# Altium PCB Sensor_node.PcbDoc
Units mil, origin at the board's own origin, x right, y up, seen from the top; angles counter-clockwise.
Board outline 3763 x 3557 mil, 2 copper layers (Top Layer, Bottom Layer); 61 components, 41 nets, 227 pads, 43 vias.
Unrouted connection lines stored in the file: 1.
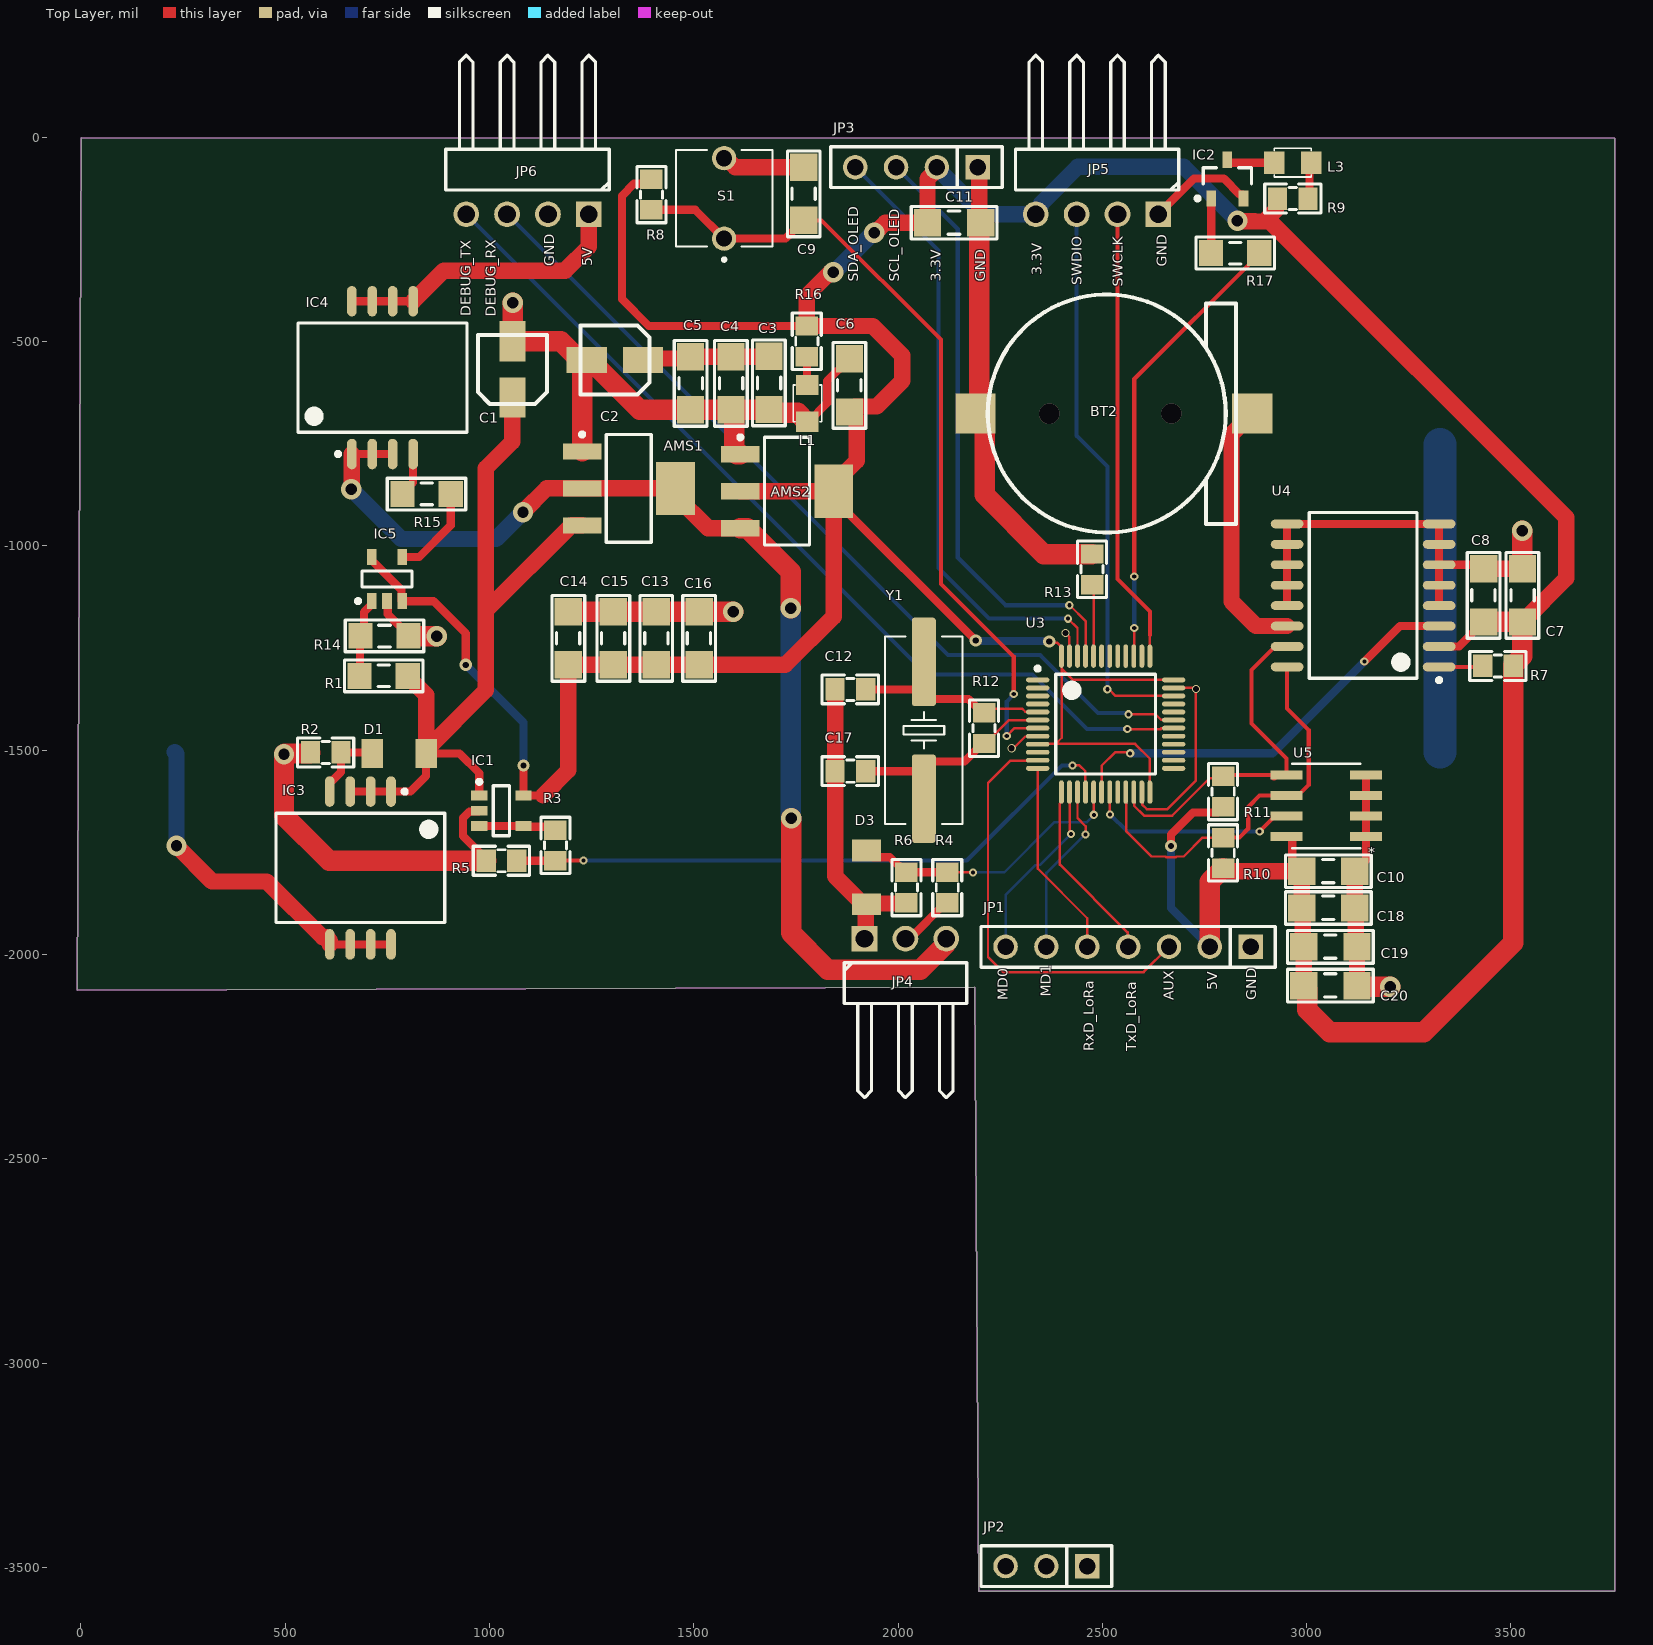
[diagram p0: Top Layer view]
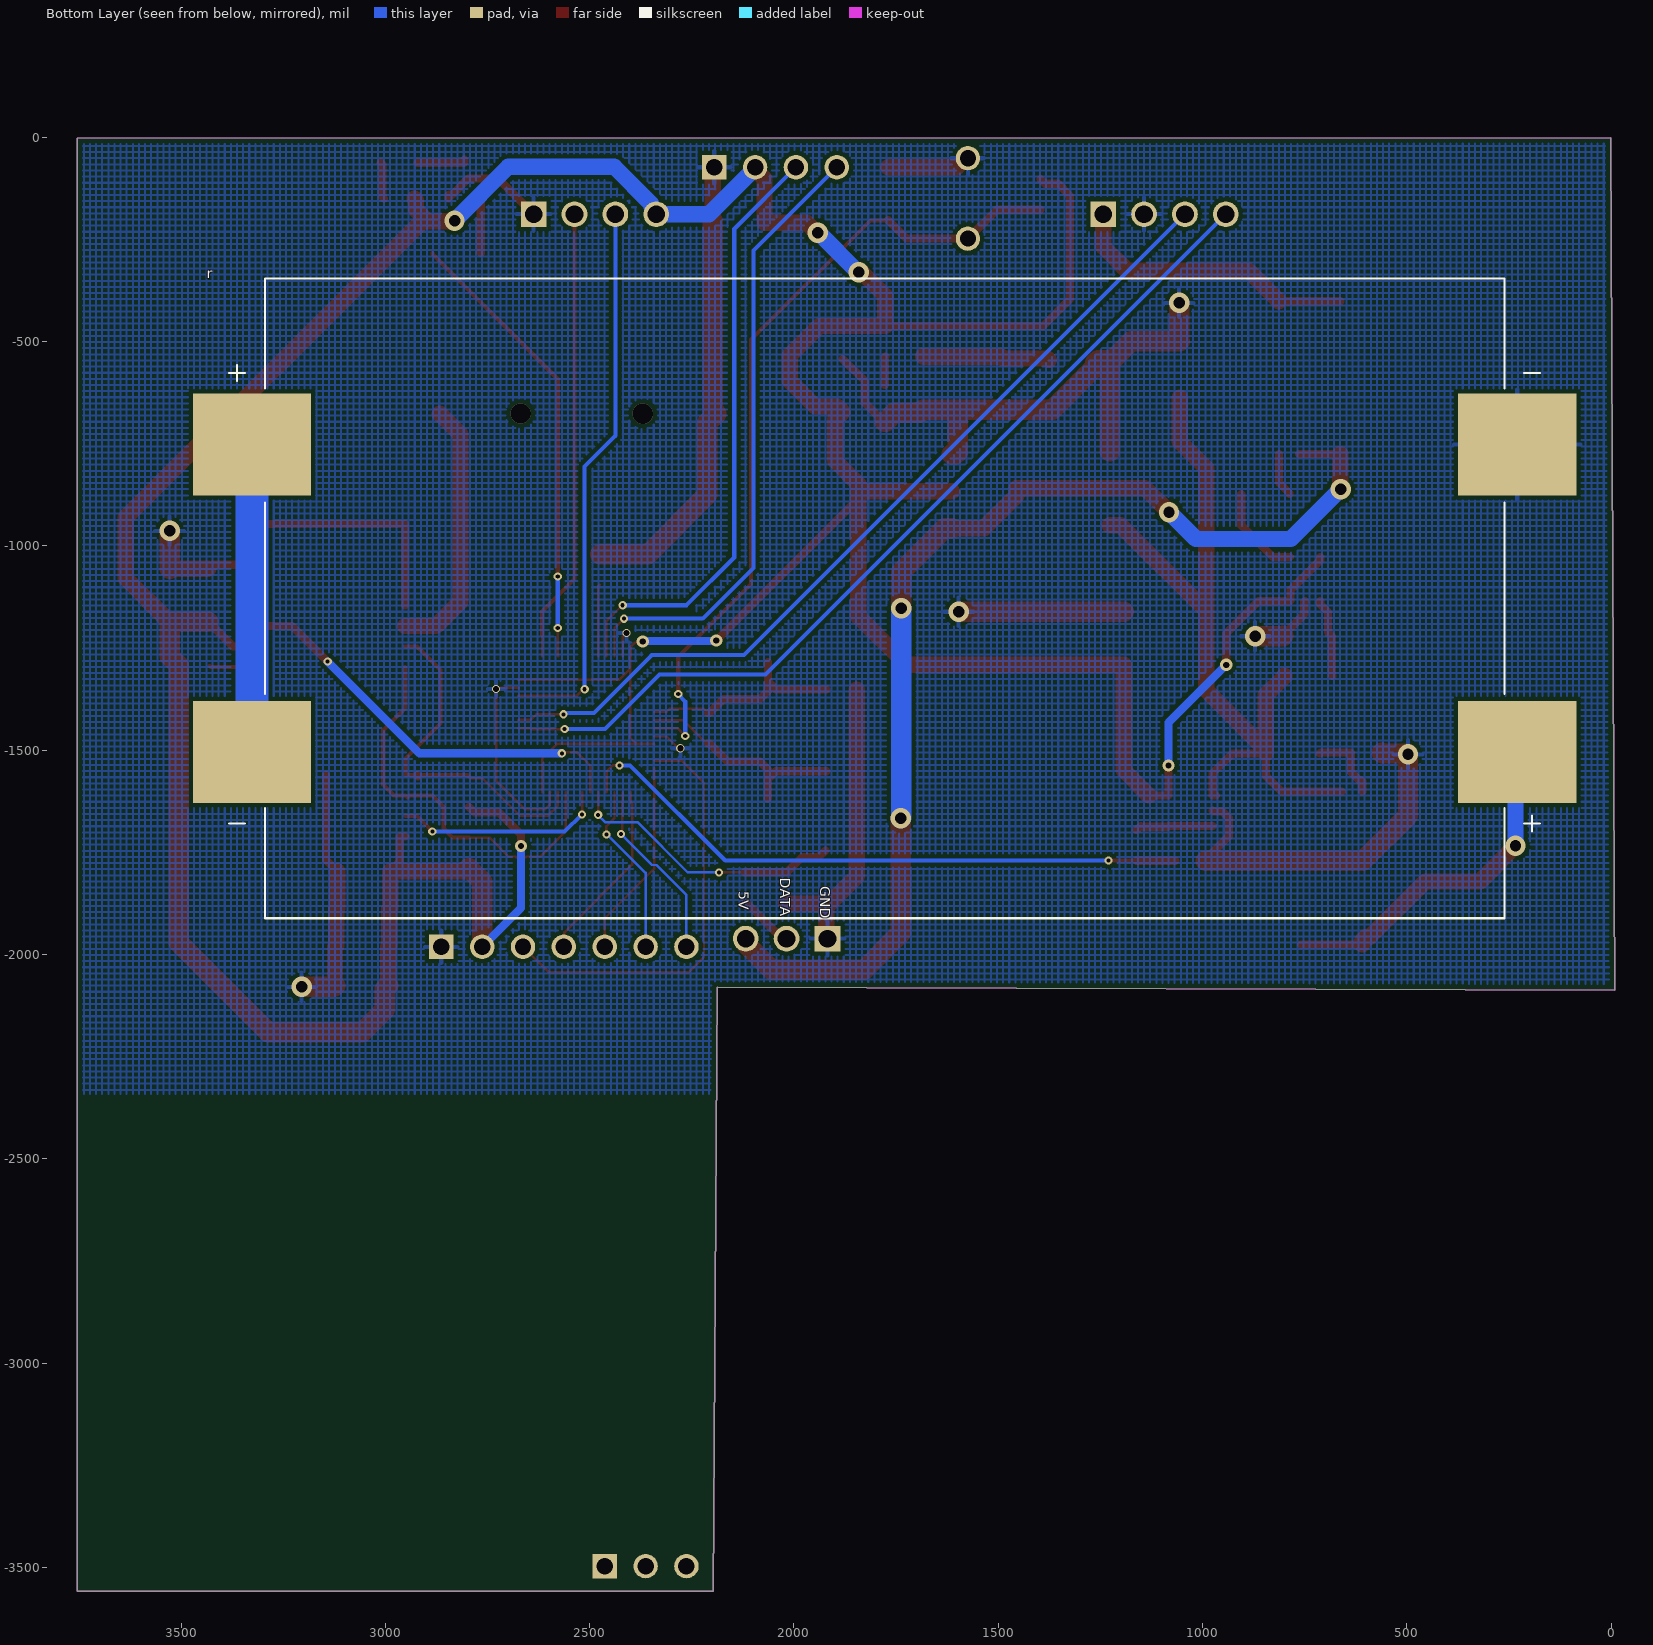
[diagram p1: Bottom Layer view, seen from below]
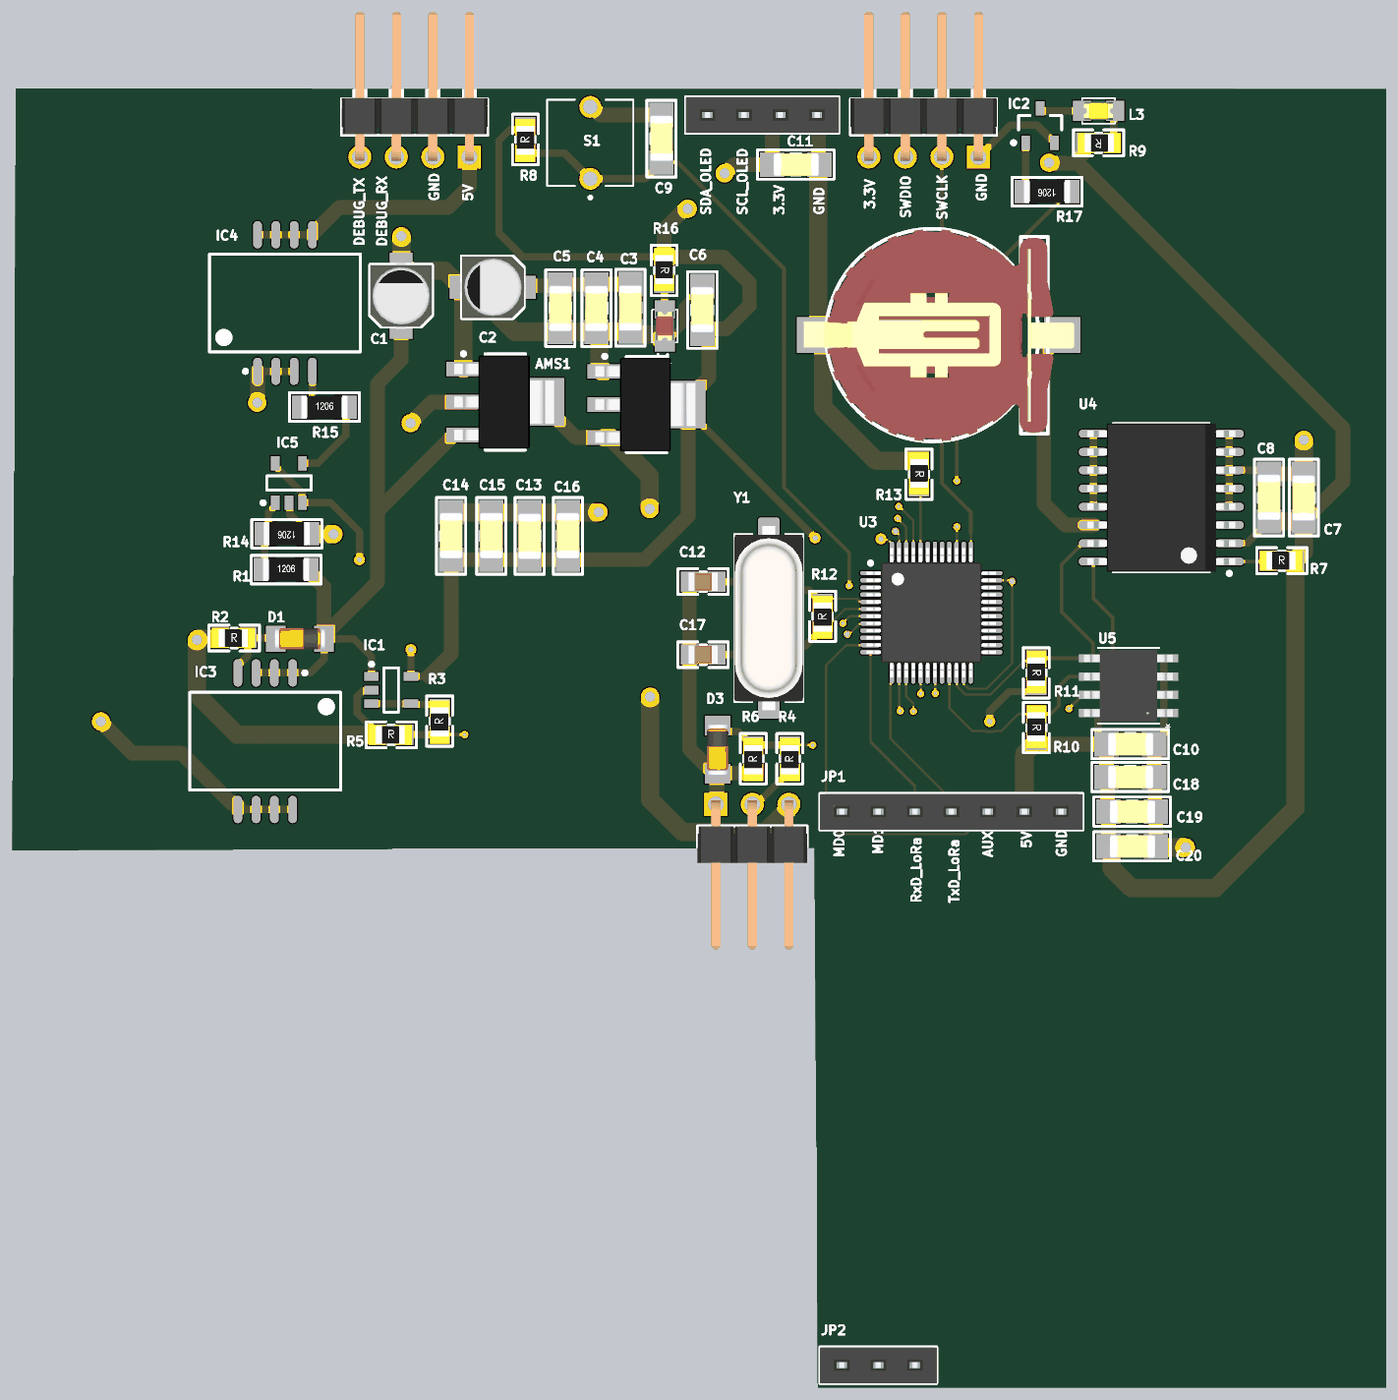
[diagram p2: 3D render of the assembled board from above, using the file's embedded part models]

## Layer stack, top to bottom
Top Solder: solder mask 0.4, Solder Resist, Dk 3.5
Top Layer: signal copper 1.4
Dielectric 1: dielectric 12.6, FR-4, Dk 4.8
Bottom Layer: signal copper 1.4
Bottom Solder: solder mask 0.4, Solder Resist, Dk 3.5

## Board outline
-9,-2087 2188,-2080 2197,-3558 3754,-3558 3754,-2 1,-1

## Design rules (kind name [scope] priority, off if disabled: settings)
Clearance [All] p1: gap=10 ignorepadtopadclearanceinfootprint=FALSE except(0: Arc-Hole Track-Hole SMDPad-Hole THPad-Hole Via-Hole Fill-Hole Poly-Hole Region-Hole Text-Hole)
PolygonConnect [All] p1: connectstyle=Relief reliefconductorwidth=10 reliefentries=4 polygonreliefangle="90 Angle" airgapwidth=10
RoutingVias [All] p1: holewidth=15 width=20 viastyle="Through Hole" minholewidth=10 minwidth=10 maxholewidth=28 maxwidth=50
SolderMaskExpansion [All] p1: expansion=4 istentingtop=FALSE
Width [All] p1: maxlimit=50 minlimit=6 preferedwidth=20
30 further rules are at their usual default settings.

## Components (designator, comment, footprint, x,y, rotation, side; value= is the part's Value field where it differs from the comment)
AMS1 "AMS1117-5V" SOT223 1341,-859 r270 top value="AMS1117-3.3V SOT223"
AMS2 "AMS1117-3.3V" SOT223 1728,-866 r270 top value="AMS1117-3.3V SOT223"
BT2 "CR1220 SMD" "DE PIN CR1220" 2528,-676 r90 top
C1 "10uF" "tu nhom 4 (b)" 1056,-568 r90 top
C2 "10uF" "tu nhom 4 (b)" 1307,-545 r180 top
C3 "104" "tu 1206" 1684,-601 r270 top
C4 "104" "tu 1206" 1591,-602 r270 top
C5 "104" "tu 1206" 1492,-602 r270 top
C6 "104" "tu 1206" 1881,-607 r90 top
C7 "106" "tu 1206" 3528,-1121 r270 top
C8 "104" "tu 1206" 3433,-1121 r90 top
C9 "104" "tu 1206" 1769,-138 r90 top
C10 "104" "tu 1206" 3053,-1796 r0 top
C11 "104" "tu 1206" 2137,-209 r0 top
C12 "22pF" "tu 0805" 1883,-1351 r0 top
C13 "106" "tu 1206" 1408,-1226 r270 top
C14 "104" "tu 1206" 1193,-1226 r90 top
C15 "104" "tu 1206" 1303,-1226 r90 top
C16 "104" "tu 1206" 1513,-1226 r90 top
C17 "22pF" "tu 0805" 1883,-1551 r0 top
C18 "106" "tu 1206" 3053,-1886 r0 top
C19 "104" "tu 1206" 3058,-1981 r0 top
C20 "106" "tu 1206" 3058,-2076 r0 top
D1 "9.1V" "DIODE ZENNER SMD SOD80" 779,-1508 r180 top
D3 "3.3V" "DIODE ZENNER SMD SOD80" 1923,-1811 r270 top
IC1 "LM321" SOT23_LM321 1029,-1648 r0 top
IC2 "NPN_LMUN2233LT1" SOT23_LMUN2233_trans 2806,-102 r90 top
IC3 "P_mosfet AO4411" SOIC8_AO4411 684,-1788 r270 top
IC4 "P_mosfet AO4411" SOIC8_AO4411 738,-587.99 r90 top
IC5 "LM321" SOT23_LM321 749,-1081 r90 top
JP1 "JP 1x7 2.54" "JP 1x7 CT" 2863,-1981 r180 top
JP2 "JP 1x3 2.54" "JP 1x3 CT" 2463,-3496.75 r180 top
JP3 "JP 1x4 2.54" "JP 1x4 CT" 2195,-73 r180 top
JP4 "JP 1x3 2.54" "JP 1x3 DC" 2168,-2061 r0 top
JP5 "JP 1x4 2.54" "JP 1x4 DC" 2287,-88 r180 top
JP6 "JP 1x4 2.54" "JP 1x4 DC" 893,-88 r180 top
L1 "LED 0805" LED-0805-Red 1778,-606 r270 top
L3 "LED 0805" LED-0805-Yellow 3011,-62 r180 top
r "1048" BAT_1048 1778,-1128 r0 bottom (schematic designator BT1)
R1 "20k" "tro smd 1206" 741,-1318 r0 top
R2 "100k" "tro smd 0805" 599,-1503 r0 top
R3 "13k" "tro smd 0805" 1159,-1733 r90 top
R4 "5.1k" "tro smd 0805" 2118,-1836 r90 top
R5 "8.2k" "tro smd 0805" 1029,-1768 r0 top
R6 "9.1k" "tro smd 0805" 2018,-1836 r90 top
R7 "4.7k" "tro smd 0805" 3468,-1291 r0 top
R8 "1k" "tro smd 0805" 1394,-140 r90 top
R9 "220R" "tro smd 0805" 2966,-152 r180 top
R10 "4.7k" "tro smd 0805" 2798,-1751 r270 top
R11 "4.7k" "tro smd 0805" 2798,-1601 r270 top
R12 "1M" "tro smd 0805" 2208,-1446 r90 top
R13 "13k" "tro smd 0805" 2477,-1057 r270 top
R14 "20k" "tro smd 1206" 743,-1220 r180 top
R15 "10k" "tro smd 1206" 846,-873 r0 top
R16 "220R" "tro smd 0805" 1779,-499 r270 top
R17 "1k" "tro smd 1206" 2825,-283 r180 top
S1 "BUTT-2" SW_BUTT-2 1574.11,-149.42 r90 top
U3 "STM32F103xx_LQFP48" STM32_LQPF48 2508,-1436 r0 top
U4 "DS3231 SMD" "SOIC 16" 3138,-1121 r180 top
U5 "AT24C32D-SSHM-B" 8S1_ATM 3048,-1636 r180 top
Y1 "8Mhz" "Thach Anh 2 chan SMD" 2063,-1451 r90 top value=4Mhz

## Footprints (in the part's own frame and the unit in brackets; to place one, negate y for a bottom-side part, rotate by r counter-clockwise, add the part's x,y. Pads: shape width x height; smd on the part's side, far side on the other; paste and mask are expansions set on the pad)
8S1_ATM [mil]
  rect 78x22 smd paste+0 mask+0: 1(-97,75) 2(-97,25) 3(-97,-25) 4(-97,-75) 5(97,-75) 6(97,-25) 7(97,25) 8(97,75)
  silkscreen extent -84,-104 84,104, body extent -122,-99 122,99, height 67
BAT_1048 [mm]
  rect 7.34x6.35 smd: N1(39.33,9.555) N2(-39.33,-9.555) P1(-39.33,9.555) P2(39.33,-9.555)
  silkscreen extent -40.75,-19.89 40.75,19.89
"DE PIN CR1220" [mm]
  rect 2.5x2.5 smd: 1(0,-8.6) 2(0,8.6)
  silkscreen extent -7.39,-7.6 7.4,7.84, body extent -7.39,-9.42 7.36,9.38, height 4.27
"DIODE ZENNER SMD SOD80" [mm] "SOD80"
  rect 1.35x1.8 smd: 1(1.675,0) 2(-1.675,0)
  body extent -1.75,-0.76 1.75,0.74, height 1.45
"JP 1x3 CT" [mm]
  rect 1.52x1.52 hole 1.02: 1(0,0)
  round 1.52 hole 1.02: 2(2.54,0) 3(5.08,0)
  silkscreen extent -1.52,-1.27 6.6,1.27, body extent -1.52,-1.25 6.6,1.25, height 8.51
"JP 1x3 DC" [mm]
  rect 1.6x1.6 hole 1.1: 1(-6.35,2.54)
  round 1.6 hole 1.1: 2(-3.81,2.54) 3(-1.27,2.54)
  silkscreen extent -7.62,-7.34 0,1.04, body extent -7.62,-7.52 0,2.84, height 2.55
"JP 1x4 CT" [mm]
  rect 1.52x1.52 hole 1.02: 1(0,0)
  round 1.52 hole 1.02: 2(2.54,0) 3(5.08,0) 4(7.62,0)
  silkscreen extent -1.52,-1.27 9.14,1.27, body extent -1.52,-1.25 9.14,1.25, height 8.51
"JP 1x4 DC" [mm] "4 pins, 1 row, right angled, gold plating"
  rect 1.6x1.6 hole 1.1: 1(-8.89,2.54)
  round 1.6 hole 1.1: 2(-6.35,2.54) 3(-3.81,2.54) 4(-1.27,2.54)
  silkscreen extent -10.16,-7.34 0,1.04, body extent -10.16,-7.57 0,2.79, height 2.54
"JP 1x7 CT" [mm] "7 row, straight, gold plating"
  rect 1.52x1.52 hole 1.02: 1(0,0)
  round 1.52 hole 1.02: 2(2.54,0) 3(5.08,0) 4(7.62,0) 5(10.16,0) 6(12.7,0) 7(15.24,0)
  silkscreen extent -1.52,-1.27 16.76,1.27, body extent -1.52,-1.25 16.76,1.25, height 8.51
LED-0805-Red [mil]
  rect 50x55 smd: 1(0,0) 2(90,0)
  silkscreen extent 0,-35 90,35, body extent 5,-25 85,25, height 43
LED-0805-Yellow [mil]
  rect 50x55 smd: 1(0,0) 2(90,0)
  silkscreen extent 0,-35 90,35, body extent 5,-25 85,25, height 43
SOIC8_AO4411 [mm] "SOIC, 8-Leads, Body 10.30x7.50mm, Pitch 1.27mm, IPC Medium Density"
  oval 1.9x0.6 smd: 1(-4.75,1.905) 2(-4.75,0.635) 3(-4.75,-0.635) 4(-4.75,-1.905) 5(4.75,-1.905) 6(4.75,-0.635) 7(4.75,0.635) 8(4.75,1.905)
  silkscreen extent -4.87,-5.25 3.4,5.25, body extent -3.8,-5.25 3.8,5.25, height 2.65
"SOIC 16" [mm] "SOIC, 16-Leads, Body 10.30x7.50mm, Pitch 1.27mm, IPC Medium Density"
  oval 2.032x0.55 smd: 1(-4.725,4.445) 2(-4.725,3.175) 3(-4.725,1.905) 4(-4.725,0.635) 5(-4.725,-0.635) 6(-4.725,-1.905) 7(-4.725,-3.175) 8(-4.725,-4.445) 9(4.725,-4.445) 10(4.725,-3.175) 11(4.725,-1.905) 12(4.725,-0.635) 13(4.725,0.635) 14(4.725,1.905) 15(4.725,3.175) 16(4.725,4.445)
  silkscreen extent -4.85,-5.15 3.35,5.39, body extent -5.15,-5.17 5.16,5.16, height 2.48
SOT23_LM321 [mm]
  rect 1x0.6 smd: 1(-1.375,0.95) 2(-1.375,0) 3(-1.375,-0.95) 4(1.375,-0.95) 5(1.375,0.95)
  silkscreen extent -1.5,-1.55 0.5,1.92, body extent -0.88,-1.52 0.87,1.53, height 1.45
SOT23_LMUN2233_trans [mm]
  rect 1x0.6 smd: 1(-1.2,1) 2(-1.2,-1) 3(1.2,0)
  silkscreen extent -1.32,-1.5 0.7,1.97, body extent -0.57,-1.52 0.83,1.52, height 1.11
SOT223 [mm]
  rect 1x2.4 smd: 1(-2.3,-2.9) 2(0,-2.9) 3(2.3,-2.9)
  rect 3.3x2.4 smd: 4(0,2.9)
  silkscreen extent -3.47,-3.02 3.35,1.4, body extent -3.25,-3.56 3.25,3.4, height 1.68
STM32_LQPF48 [mm]
  oval 1.45x0.3 smd: 1(-4.225,2.75) 2(-4.225,2.25) 3(-4.225,1.75) 4(-4.225,1.25) 5(-4.225,0.75) 6(-4.225,0.25) 7(-4.225,-0.25) 8(-4.225,-0.75) 9(-4.225,-1.25) 10(-4.225,-1.75) 11(-4.225,-2.25) 12(-4.225,-2.75) 25(4.225,-2.75) 26(4.225,-2.25) 27(4.225,-1.75) 28(4.225,-1.25) 29(4.225,-0.75) 30(4.225,-0.25) 31(4.225,0.25) 32(4.225,0.75) 33(4.225,1.25) 34(4.225,1.75) 35(4.225,2.25) 36(4.225,2.75)
  oval 0.3x1.45 smd: 13(-2.75,-4.225) 14(-2.25,-4.225) 15(-1.75,-4.225) 16(-1.25,-4.225) 17(-0.75,-4.225) 18(-0.25,-4.225) 19(0.25,-4.225) 20(0.75,-4.225) 21(1.25,-4.225) 22(1.75,-4.225) 23(2.25,-4.225) 24(2.75,-4.225) 37(2.75,4.225) 38(2.25,4.225) 39(1.75,4.225) 40(1.25,4.225) 41(0.75,4.225) 42(0.25,4.225) 43(-0.25,4.225) 44(-0.75,4.225) 45(-1.25,4.225) 46(-1.75,4.225) 47(-2.25,4.225) 48(-2.75,4.225)
  silkscreen extent -4.35,-3.1 3.1,3.57, body extent -4.5,-4.5 4.5,4.5, height 1.6
SW_BUTT-2 [mm]
  round 1.508 hole 1: 1(-2.5,0) 2(2.5,0)
  silkscreen extent -3.9,-3 3,3
"Thach Anh 2 chan SMD" [mm] "SMD Crystal HC49/US-SM package"
  round 0.508 on Mech15: 0(0,0)
  rrect25% 5.5x1.5 smd: 1(-4.25,0) 2(4.25,0)
  silkscreen extent -5.84,-2.41 5.84,2.41, body extent -6.4,-2.41 6.4,2.42, height 4.29
"tro smd 0805" [mm]
  rect 1.2x1.4 smd: 1(-0.946,-0.061) 2(0.954,-0.061)
  silkscreen extent -1.75,-0.97 1.75,0.84, body extent -1.56,-0.76 1.44,0.64, height 0.53
"tro smd 1206" [mm]
  rect 1.5x1.6 smd: 1(-1.5,0) 2(1.5,0)
  silkscreen extent -2.44,-0.99 2.44,0.99, body extent -1.6,-0.8 1.6,0.8, height 0.6
"tu 0805" [mm] "Compoment SMD 80x50mil"
  rect 1.2x1.4 smd: 1(-0.946,-0.003) 2(0.954,-0.003)
  silkscreen extent -1.75,-0.89 1.75,0.89, body extent -1.01,-0.64 1.01,0.63, height 0.61
"tu 1206" [mm]
  rect 1.7x1.7 smd: 1(-1.65,0) 2(1.65,0)
  silkscreen extent -2.67,-1.02 2.67,1.02, body extent -1.57,-0.8 1.63,0.8, height 0.94
"tu nhom 4 (b)" [mm]
  rect 2.5x1.6 smd: 1(-1.75,0) 2(1.75,0)
  silkscreen extent -2.15,-2.15 2.15,2.15, body extent -2.31,-2.15 2.29,2.15, height 3.91

## Part data
AMS1 AMS2: library part "AMS1117 SMD", "Dán", Chung_Loai=Dán, Don_Vi=Con, Ma_Hang=MH000596
BT2: library part "De pin CR1220 SMD", Ma_Hang=MH000833, Ten="Đế PIN CR1220 SMD"
C1 C2: library part "Tu Nhom 10uF 25V", "Dán", Chung_Loai=Dán, Don_Vi=Con, Ma_Hang=MH002230, So_Chan=2, Ten_Linh_Kien="Tụ Nhôm 10uF 25V 4x5MM"
C3 C4 C5 C6 C8 C9 C10 C11 C14 C15 C16 C19: library part "Tu 1206 104 50V 20%", "Dán", Chung_Loai=Dán, Don_Vi=Con, Ma_Hang=MH004544, So_Chan=2, Ten_Linh_Kien="Tụ 1206 104-0.1uF 20% 50V"
C7 C13 C18 C20: library part "Tu 1206 106 16V 20%", "Dán", Chung_Loai=Dán, Don_Vi=Con, Ma_Hang=MH004541, So_Chan=2, Ten_Linh_Kien="Tụ 1206 106-10uF 20% 16V"
C12 C17: library part "Tu 0805 22pF 50V 10%", "Dán", Chung_Loai=Dán, Don_Vi=Con, Ma_Hang=MH004560, So_Chan=2, Ten_Linh_Kien="Tụ 0805 22P 10% 50V"
D1: library part "Diode Zener 9.1V", "Dán", Chung_Loai=Dán, Don_Vi=Con, Ma_Hang=MH002882, Ten_Linh_Kien="Diode Zener 1/2W 9.1V SMD1206 ZMM9.1"
D3: library part "Diode Zener 3.3V", "Dán", Chung_Loai=Dán, Don_Vi=Con, Ma_Hang=MH002880, Ten_Linh_Kien="Diode Zener 1/2W 3.3V SMD1206 ZMM3.3"
JP1: library part "JP 1x7 2.54 Cai Thang", "Cắm", Chung_Loai=Cắm, Don_Vi=Con, Ma_Hang=MH004006, Ten_Linh_Kien="Jump Đơn Cái 2.54MM 1x20P Thẳng"
JP2: library part "JP 1x3 2.54 Cai Thang", "Cắm", Chung_Loai=Cắm, Don_Vi=Con, Ma_Hang=MH004006, Ten_Linh_Kien="Jump Đơn Cái 2.54MM 1x20P Thẳng"
JP3: library part "JP 1x4 2.54 Cai Thang", "Cắm", Chung_Loai=Cắm, Don_Vi=Con, Ma_Hang=MH004006, Ten_Linh_Kien="Jump Đơn Cái 2.54MM 1x20P Thẳng"
JP4: library part "JP 1x3 2.54 Duc Cong", "Cắm", Chung_Loai=Cắm, Don_Vi=Con, Ma_Hang=MH000904, Ten_Linh_Kien="Jump Đơn Đực 2.54MM 1x40P Cong Đứng"
JP5 JP6: library part "JP 1x4 2.54 Duc Cong", "Cắm", Chung_Loai=Cắm, Don_Vi=Con, Ma_Hang=MH000904, Ten_Linh_Kien="Jump Đơn Đực 2.54MM 1x40P Cong Đứng"
L1: library part "LED 0805 Do", "Dán", Chung_Loai=Dán, Don_Vi=Con, Ma_Hang=MH000897, Ten_Linh_Kien="LED 0805 Màu Đỏ (Red)"
L3: library part "LED 0805 Vang", "Dán", Chung_Loai=Dán, Don_Vi=Con, Ma_Hang=MH002329, Ten_Linh_Kien="LED 0805 Màu Vàng ( Yellow)"
r: Package=None, Availability=Unavailable, MP=1048, Price=None
R1 R14 R15: library part "Tro 1206 1% 2.2k", "Dán", Chung_Loai=Cắm, Don_Vi=Con, Ma_Hang=MH005882, So_Chan=2, Ten_Linh_Kien="Trở 1206 1% 2.2k"
R2: library part "Tro 0805 5% 100k", "Dán", Chung_Loai=Dán, Don_Vi=Con, Ma_Hang=MH005250, So_Chan=2, Ten_Linh_Kien="Trở 0805 5% 100k"
R3 R4 R6 R13: library part "Tro 0805 5% 12k", "Dán", Chung_Loai=Dán, Don_Vi=Con, Ma_Hang=MH005241, So_Chan=2, Ten_Linh_Kien="Trở 0805 5% 12k"
R5: library part "Tro 0805 5% 8.2k", "Dán", Chung_Loai=Dán, Don_Vi=Con, Ma_Hang=MH005312, So_Chan=2, Ten_Linh_Kien="Trở 0805 5% 8.2k"
R7 R10 R11: library part "Tro 0805 5% 4.7k", "Dán", Chung_Loai=Dán, Don_Vi=Con, Ma_Hang=MH005307, So_Chan=2, Ten_Linh_Kien="Trở 0805 5% 4.7k"
R8: library part "Tro 0805 5% 1k", "Dán", Chung_Loai=Dán, Don_Vi=Con, Ma_Hang=MH005234, So_Chan=2, Ten_Linh_Kien="Trở 0805 5% 1k"
R9: library part "Tro 0805 5% 220R", "Dán", Chung_Loai=Dán, Don_Vi=Con, Ma_Hang=MH005259, So_Chan=2, Ten_Linh_Kien="Trở 0805 5% 220R"
R12: library part "Tro 0805 1% 1M", "Dán", Chung_Loai=Dán, Don_Vi=Con, Ma_Hang=MH005469, So_Chan=2, Ten_Linh_Kien="Trở 0805 1% 1M"
R16: library part "Tro 0805 1% 0.5R", "Dán", Chung_Loai=Dán, Don_Vi=Con, Ma_Hang=MH005465, So_Chan=2, Ten_Linh_Kien="Trở 0805 1% 0.5R"
R17: library part "Tro 1206 1% 1k", "Dán", Chung_Loai=Dán, Don_Vi=Con, Ma_Hang=MH005880, So_Chan=2, Ten_Linh_Kien="Trở 1206 1% 1k"
S1: "Tactile Switches MINI PUSH BUTTON SWITCH 2-PIN QTY. 4", Package=None, Availability="In Stock", Check_prices=https://www.snapeda.com/parts/BUTT-2/Gravitech/view-part/?ref=eda, MF=Gravitech, MP=BUTT-2, Price=None, Purchase-URL=https://pricing.snapeda.com/search/part/BUTT-2/?ref=eda, SnapEDA_Link=https://www.snapeda.com/parts/BUTT-2/Gravitech/view-part/?ref=snap
U4: "SOIC"
U5: "No Description Available", Mfr_Name=Microchip, RefDes=RefDes, TYPE=Type
Y1: library part "Thach Anh 2 chan SMD", "Crystal For all Crystal 2pin."
U3: ComponentLink1Description="Manufacturer Link", ComponentLink1URL=www.st.com/stm32, ComponentLink2Description=Datasheet, ComponentLink2URL=http://www.st.com/stonline/products/literature/ds/13587.pdf, DatasheetVersion="rev6, Mar-2008", PackageDescription="48-Pin Low-Profile Quad Flat Pack, 7 x 7 mm Body, 0.5 mm Pitch (LQFP48)", PackageReference=LQFP48, PackageVersion=Mar-2008, Published=30-May-2008, Publisher="Altium Limited"

## Via types
v1: diameter 20, hole 10, Top Layer to Bottom Layer, 19 vias
v2: diameter 50, hole 28, Top Layer to Bottom Layer, 14 vias
v3: diameter 30, hole 15, Top Layer to Bottom Layer, 5 vias
v4: diameter 20, hole 15, Top Layer to Bottom Layer, 3 vias
v5: diameter 50, hole 50, Top Layer to Bottom Layer, 2 vias

## Nets (pads, with @x,y where several pads share a name; then routed paths per layer and width w, separated by ;. In a path a pad name is that pad's centre, name@x,y a point inside that pad or via, vN(x,y) a via of type N, cw(c..) or ccw(c..) an arc to the next point about the centre after c; other vN are vias at no path point)
+5V: AMS1.2 AMS1.4 AMS2.3 C2.1 C3.1 C4.1 C5.1 IC4.1 IC4.2 IC4.3 JP4.3 | length 3111
  Top Layer w20: v2(662,-861) 662.5,-860.5 v2@663,-860 ; IC4.1 IC4.2 IC4.3
  Top Layer w40: v2@662.5,-860.5 662.5,-775.5 IC4.1 ; v2(1082,-917) 1140,-859 AMS1.2 AMS1.4 1455.17,-876.72 1534.69,-956.24 1613.51,-956.24 AMS2.3 ; C2.1 1379.88,-541.02 1488.02,-541.02 C5.1 C4.1 1591.5,-536.54 1683.5,-536.54 C3.1
  Top Layer w50: AMS2.3 1630.76,-956.55 1737,-1062.8 v2(1737,-1152) ; v2(1738,-1666) 1738,-1947 1828,-2037 2054,-2037 2115.51,-1975.49 2115.51,-1963.49 JP4.3
  Bottom Layer w40: v2(662,-861) 784,-983 1016,-983 v2(1082,-917)
  Bottom Layer w50: v2(1737,-1152) 1737,-1665 v2(1738,-1666)
AUX: JP1.3 U3.11 | length 1054.6
  Top Layer w6: U3.11 2340.88,-1525.36 2274.64,-1525.36 2220.08,-1579.92 2220.08,-2006.08 2257,-2043 2601,-2043 JP1.3
DEBUG_RX: JP6.3 U3.31 | length 2144.8
  Top Layer w6: v1(2564,-1412) 2630.49,-1412 2643.87,-1425.38 2673.56,-1425.38 U3.31
  Bottom Layer w10: JP6.3 2122,-1267 2348,-1267 2348,-1268 2489,-1409 2561,-1409 v1(2564,-1412)
DEBUG_TX: JP6.4 U3.30 | length 2254.1
  Top Layer w6: v1(2561,-1448) 2642.49,-1448 2643.87,-1446.62 2673.56,-1446.62 U3.30
  Bottom Layer w10: JP6.4 2070,-1315 2328.93,-1315 2461.93,-1448 v1(2561,-1448)
FLOW: D3.2 R4.2 R6.2 U3.17 | length 693.2
  Top Layer w6: R4.2 2182.43,-1798.43 v1(2183,-1799) ; U3.17 2478.74,-1602.6 2478.74,-1657.74 v1(2479,-1658)
  Top Layer w20: D3.2 1939.57,-1761.63 1979.66,-1761.63 2016.46,-1798.43 R6.2 R4.2
  Bottom Layer w6: v1(2183,-1799) 2259.89,-1799 2382.92,-1675.98 2462.02,-1675.98 2479,-1659 v1(2479,-1658)
GND: AMS1.1 AMS2.1 BT2.2 C1.2 C2.2 C3.2 C4.2 C5.2 C6.2 C7.1 C8.2 C9.2 C10.2 C11.2 C12.1 C13.1 C14.2 C15.2 C16.2 C17.1 C18.2 C19.2 C20.2 D3.1 IC1.2 IC2.2 IC5.2 JP1.1 JP3.1 JP4.1 JP5.1 JP6.2 L1.2 R2.1 R5.1 R6.1 R13.1 R14.1 r.N2 S1.2 U3.8 U3.23 U3.35 U3.47 U4.4 U4.5 U4.6 U4.7 U4.8 U4.9 U4.10 U4.11 U4.12 U4.13 U5.1 U5.2 U5.3 U5.4 | length 7621.2
  Top Layer w6: v4(2278,-1495) 2282.5,-1495 2311.19,-1466.31 2340.88,-1466.31 U3.8 ; v4(2410,-1213) 2419.42,-1222.42 U3.47 ; U3.23 2597.36,-1603.12 2597.36,-1632.81 2608.44,-1643.88 2659.12,-1643.88 2729,-1574 v4(2729,-1350) 2726.42,-1347.42 U3.35 U3.35@2675.12,-1348.2
  Top Layer w20: IC5.2 750.81,-1136.94 750.81,-1166.79 802.06,-1218.03 R14.1 ; IC1.2 973.06,-1649.81 950.68,-1649.81 935.18,-1665.31 935.18,-1709.87 991.77,-1766.46 R5.1 ; L1.2 1780.5,-696 1826.52,-649.98 1826.52,-596.52 C6.2 ; JP5.1 2724,-101 2797.13,-101 2835.68,-139.56 2843.56,-139.56 2845.37,-141.37 IC2.2 ; U4.13 U4.12 U4.11 U4.10 U4.9 U4.8 U4.7 U4.6 ; C10.2 3145,-1768.96 U5.1 U5.2 U5.3 U5.4 ; U4.4 U4.5 U4.6 ; C8.2 3422.96,-1046 U4.6
  Top Layer w40: S1.2 1579.35,-51 1601.4,-73.04 C9.2 ; C12.1 C17.1 1845.77,-1808.57 1914.14,-1876.94 D3.1 ; JP4.1 1920.5,-1958.5 1920.5,-1879.44 D3.1 ; R6.1 2018.54,-1875.09 1924.86,-1875.09 D3.1 ; JP3.1 2198.48,-76.48 2198.48,-205.52 C11.2 ; C10.2 C18.2 3120.46,-1888.5 3120.46,-1978.5 C19.2 C20.2 ; C8.2 C7.1
  Top Layer w50: R2.1 561.77,-1506.57 560.39,-1507.95 499.05,-1507.95 v2(497,-1510) 497,-1660 607.39,-1770.39 R5.1 ; R14.1 803.06,-1221 v2(871,-1221) ; v2(1057,-405) 1057,-498.1 C1.2 1174.49,-499.1 1220.39,-545 C2.2@1233.32,-545 ; C14.2 C15.2 C13.1 C16.2 v2(1596.96,-1161.04) ; AMS1.1 1226.83,-551.5 C2.2@1233.32,-545 ; C2.2 C2.2@1233.32,-545 ; C2.2@1245.69,-545 1255.82,-545 1262.32,-551.5 1262.32,-561.62 1367.65,-666.96 C5.2 C4.2 ; AMS2.1 1604.78,-775.45 1599.46,-770.13 1599.46,-675.43 C4.2 ; L1.2 1775.5,-696 1753.93,-674.43 1692.46,-674.43 C3.2 1683.5,-666.46 1591.5,-666.46 C4.2 ; C11.2@2198.48,-205.52 2198.48,-666.94 BT2.2 2211.78,-698.36 2211.78,-874.78 2356.77,-1019.77 R13.1 ; C20.2 3125.96,-2079 v2(3205,-2079) ; C7.1 v2(3528,-963)
INT_RTC: U3.18 U4.3 | length 1034
  Top Layer w6: U3.18 2498.16,-1537.84 2531,-1505 2565.57,-1505 v1(2568,-1507.43)
  Top Layer w20: v1(3141,-1283) 3228,-1196 U4.3
  Bottom Layer w20: v1(2568,-1507.43) 2916.57,-1507.43 v1(3141,-1283)
LED: R17.1 U3.39 | length 1113.9
  Top Layer w6: U3.39 2577.68,-1268.88 2577.68,-1239.19 2578,-1238.87 v1(2578,-1201)
  Top Layer w10: v1(2578,-1075) 2578,-591.02 2884.06,-284.97 R17.1
  Bottom Layer w10: v1(2578,-1201) v1(2578,-1075)
MD0: JP1.7 U3.14 | length 452.9
  Top Layer w6: U3.14 2419.42,-1626.76 2420.32,-1627.66 2420.32,-1702.32 v1(2423,-1705)
  Bottom Layer w6: JP1.7 2263,-1854 2336.16,-1780.84 2347.16,-1780.84 v1(2423,-1705)
MD1: JP1.6 U3.15 | length 427.8
  Top Layer w6: U3.15 2439.1,-1666.03 2459,-1685.93 v1(2459,-1706)
  Bottom Layer w6: JP1.6 2363,-1800 2457,-1706 v1(2459,-1706)
nBOOT: R13.2 U3.44 | length 176.7
  Top Layer w6: R13.2 2478.47,-1098.44 U3.44
NetBT1_N1: r.N1 r.P2 | length 752.4
  Bottom Layer w80: r.N1 r.P2
NetBT1_P1: IC3.5 IC3.6 IC3.7 IC3.8 r.P1 | length 861.9
  Top Layer w20: IC3.5 IC3.6 IC3.7 IC3.8
  Top Layer w40: v2(234,-1734) 321,-1821 454.99,-1821 591.6,-1957.61 600.81,-1957.61 609,-1965.8 IC3.5
  Bottom Layer w40: r.P1 234,-1508.61 v2(234,-1734)
NetBT2_1: BT2.1 U4.14 | length 641.8
  Top Layer w40: BT2.1 2816,-726.58 2816,-1136 2876,-1196 U4.14
NetD1_1: D1.1 IC3.4 R2.2 | length 186.9
  Top Layer w20: IC3.4 609,-1576.38 610.67,-1574.71 614.71,-1574.71 636.57,-1552.84 R2.2 710.45,-1505.39 D1.1
NetIC1_3: IC1.3 IC1.4 R3.2 | length 192.5
  Top Layer w20: IC1.3 IC1.4 1084.94,-1687.21 1148.76,-1687.21 1150.97,-1685 R3.2
NetIC2_1: IC2.1 R17.2 | length 134
  Top Layer w20: R17.2 2766.29,-282.66 2766.29,-149.59 IC2.1
NetIC2_3: IC2.3 L3.2 | length 121.2
  Top Layer w20: IC2.3 2806,-60.19 2807.81,-62 L3.2
NetIC4_4: IC4.4 R15.1 | length 108.8
  Top Layer w20: R15.1 786.94,-871.03 813,-844.98 IC4.4
NetIC5_1: IC5.1 R1.1 R14.2 | length 195.1
  Top Layer w20: R1.1 682.94,-1317 682.94,-1221 R14.2 692.61,-1211.34 692.61,-1162 711.6,-1143.01 IC5.1
NetIC5_4: IC5.4 R15.2 | length 227.5
  Top Layer w20: IC5.4 828.13,-1026.87 905.06,-949.94 R15.2
NetJP4_2: JP4.2 R4.1 | length 138.7
  Top Layer w20: JP4.2 2028.68,-1961 2116.46,-1873.23 R4.1
NetL1_1: L1.1 R16.2 | length 70
  Top Layer w20: R16.2 1777.3,-537.27 1777.3,-605.3 L1.1
NetL3_1: L3.1 R9.1 | length 90.8
  Top Layer w20: R9.1 3007.11,-145.72 3007.11,-65.89 L3.1
NetR7_1: R7.1 U4.1 | length 107.8
  Top Layer w10: U4.1 3428.17,-1296 R7.1
nOSC_IN: C12.2 R12.2 U3.5 Y1.2 | length 530.5
  Top Layer w6: R12.2 2220.82,-1398 2303.5,-1398 2311.19,-1405.69 2340.88,-1405.69 U3.5
  Top Layer w20: C12.2 2043.47,-1351.13 Y1.2@2063,-1331.61 ; Y1.2 Y1.2@2063,-1331.61 ; R12.2 2206.46,-1408.43 2172.59,-1374.56 2082.53,-1374.56 2063,-1355.04 Y1.2@2063,-1331.61
nOSC_OUT: C17.2 R12.1 U3.6 Y1.1 | length 550.6
  Top Layer w6: R12.1 2214.33,-1483.23 2271.4,-1426.16 U3.6
  Top Layer w20: C17.2 2043.47,-1551.13 Y1.1@2063,-1570.66 ; Y1.1 Y1.1@2063,-1570.66 ; R12.1 2206.46,-1483.23 2162.25,-1527.44 2082.53,-1527.44 2063,-1546.96 Y1.1@2063,-1570.66
nSWCLK: JP5.2 U3.37 | length 1114.5
  Top Layer w6: U3.37 2616.27,-1217.73
  Top Layer w10: JP5.2 2537,-1081.03 2616.27,-1160.3 2616.27,-1217.73
nSWDIO: JP5.3 U3.34 | length 1362.9
  Top Layer w6: v1(2512,-1350.73) 2515.73,-1350.73 2532.1,-1367.1 U3.34
  Bottom Layer w10: JP5.3 2437,-730.16 2512,-805.16 v1(2512,-1350.73)
RESET: C9.1 R8.1 S1.1 U3.7 | length 2011.5
  Top Layer w6: v1(2266,-1465) 2285.16,-1445.84 U3.7@2341.36,-1445.84
  Top Layer w10: C9.1 1812.96,-202.96 2105,-495 2105,-1093 2283,-1271 v1(2283,-1362)
  Top Layer w20: R8.1 1503.49,-177.23 S1.1 1724.11,-247.85 C9.1
  Bottom Layer w10: v1(2266,-1465) 2266,-1380.36 2283,-1363.36 v1(2283,-1362)
RxD_LoRa: JP1.5 U3.12 | length 487
  Top Layer w6: U3.12 2341.66,-1789.66 2463,-1911 JP1.5
SCL_OLED: JP3.3 U3.45 | length 1480.7
  Top Layer w6: v1(2419,-1145) 2420,-1145 2458.79,-1183.79 U3.45
  Bottom Layer w10: JP3.3 2146,-224 2146,-1028 2263,-1145 v1(2419,-1145)
SCL_RTC: R10.1 U3.21 U4.16 U5.6 | length 989
  Top Layer w6: U3.21 2557.99,-1603.12 2557.99,-1697.99 2620,-1760 2654.4,-1760 2656.4,-1762 2679.6,-1762 2681.6,-1760 2699,-1760 2745.23,-1713.77 R10.1
  Top Layer w10: R10.1 2835.23,-1713.77 2857,-1692 2857,-1639 2885,-1611 2941,-1611 2946,-1616 U5.6 2979,-1611 3005,-1585 3005,-1450.61 2951.98,-1397.59 U4.16
SDA_OLED: JP3.4 U3.46 | length 1535.1
  Top Layer w6: v1(2416,-1178) 2439.1,-1201.1 U3.46
  Bottom Layer w10: JP3.4 2099,-277 2099,-1054 2223,-1178 v1(2416,-1178)
SDA_RTC: R11.1 U3.22 U4.15 U5.5 | length 865.8
  Top Layer w6: U3.22 2577.68,-1603.12 2577.68,-1635.75 2601.81,-1659.88 2604.75,-1659.88 2604.87,-1660 2671,-1660 2762.56,-1568.44 2790.94,-1568.44 R11.1
  Top Layer w10: R11.1 2798.38,-1561 2923,-1561 U5.5 2951,-1520 2865,-1434 2865,-1303.8 2922.8,-1246 U4.15
  Top Layer w20: U5.5@2920.23,-1563.77 U5.5@2923,-1561
TxD_LoRa: JP1.4 U3.13 | length 449.4
  Top Layer w6: U3.13 2399.73,-1626.55 2396,-1630.28 2396,-1780 2561.59,-1945.59 2561.59,-1979.59 JP1.4
V_BAT+: AMS1.3 C1.1 D1.2 IC1.1 IC3.1 IC3.2 IC3.3 R1.2 | length 1949.5
  Top Layer w20: IC3.3 IC3.2 IC3.1 806.99,-1600.99 844.94,-1563.04 D1.2 926.73,-1508 974.87,-1556.13 IC1.1 IC1.1@966.99,-1610.6
  Top Layer w40: R1.2 800.06,-1319.97 844.94,-1364.86 D1.2@844.94,-1499.14 ; D1.2 D1.2@844.94,-1499.14 ; C1.1 1056,-745 991,-810 991,-1158.45 ; AMS1.3 1199.9,-949.55 1199.27,-950.18 991,-1158.45 ; D1.2@844.94,-1499.14 991,-1353.09 991,-1158.45
V_BAT_ADC: R3.1 R5.2 U3.16 | length 1545.6
  Top Layer w6: v1(2427,-1537) 2444,-1537 2458.01,-1551.01 2458.01,-1601.56 U3.16
  Top Layer w10: R3.1 1229.77,-1770.23 v1(1230,-1770)
  Top Layer w20: R5.2 1066.66,-1770.31 1161.31,-1770.31 R3.1
  Bottom Layer w10: v1(1230,-1770) 2168,-1770 2401,-1537 v1(2427,-1537)
V_USB: IC4.5 IC4.6 IC4.7 IC4.8 JP6.1 | length 715.1
  Top Layer w20: IC4.8 IC4.7 IC4.6 IC4.5
  Top Layer w40: IC4.5 887.98,-326 1185,-326 1243,-268 JP6.1
VDD: AMS2.2 AMS2.4 C6.1 C7.2 C8.1 C10.1 C11.1 C13.2 C14.1 C15.1 C16.1 C18.1 C19.1 C20.1 IC1.5 IC5.3 IC5.5 JP1.2 JP3.2 JP5.4 R7.2 R8.2 R9.2 R10.2 R11.2 R16.1 U3.9 U3.24 U3.36 U3.48 U4.2 U5.8 | length 11467.9
  Top Layer w6: U3.9 2342.44,-1484.43 2385.57,-1484.43 ; v3(2370,-1234) 2372.48,-1236.48 2389.19,-1236.48 2399.73,-1247.02 U3.48 U3.48@2400.09,-1270.02 ; U3.48@2400.51,-1270.44 2400.51,-1469.49 2385.57,-1484.43 ; 2401.11,-1300.73 2428.11,-1327.73 U3.36 ; U3.24 2616.27,-1520.74 2579.96,-1484.43 2385.57,-1484.43
  Top Layer w20: IC5.5 711.6,-1034.74 784.59,-1107.73 784.59,-1133.32 IC5.3 862.87,-1135.13 942,-1214.27 v3(942,-1291) ; v3(1083,-1537) 1083.07,-1537.07 1083.07,-1610.53 IC1.5 1131.6,-1610.6 ; R8.2 1385.5,-113.32 1353.68,-113.32 1324,-143 1324,-396 1389.77,-461.77 R16.1 ; AMS2.4@1842.17,-883.72 v3(2190,-1231.54) ; v3(2668,-1734) 2668,-1706 2721.8,-1652.2 2781.98,-1652.2 R11.2 ; U5.8 2963.57,-1711 2964.57,-1712 2964.57,-1772.54 C10.1 ; U4.2 3324.34,-1245.68 3373.28,-1245.68 C8.1
  Top Layer w40: 1131.6,-1610.6 1193,-1549.2 C14.1 C15.1 C13.2 C16.1 1724.04,-1290.96 1842.17,-1172.83 1842.17,-883.72 AMS2.4 ; AMS2.2 AMS2.4 ; v2(1841,-330) 1834,-330 1776.61,-387.39 R16.1 1937.77,-461.77 2010,-534 2010,-596 1947.5,-658.5 1894.46,-658.5 C6.1 1899,-689.96 1899,-791.46 1842.17,-848.28 AMS2.4 ; v2(1942,-233) 1944.71,-233 1968.71,-209 C11.1 2072.04,-101.33 2095,-78.37 JP3.2 ; R10.2 2799.54,-1788.57 2806.97,-1796 C10.1 C18.1 2990.54,-1888.5 2990.54,-1978.5 C19.1 C20.1 ; v2(2830.59,-203.8) 2831.87,-205.09 2872.94,-205.09 ; 2876.88,-205.72 2896.28,-205.72 ; R9.2 2924.8,-153.23 2924.8,-177.2 2896.28,-205.72 ; C7.2 3635,-1078.96 3635,-930.49 2910.22,-205.72 2896.28,-205.72
  Top Layer w50: JP1.2@2763,-1979.4 2763,-1821.18 2793.05,-1791.13 2793.05,-1789.95 2794.43,-1788.57 R10.2 ; C20.1 3001.5,-2084.46 3001.5,-2135.5 3056,-2190 3287,-2190 3505.57,-1971.43 R7.2 3505.57,-1292.21 3528,-1269.79 C7.2 C8.1
  Bottom Layer w20: v3(942,-1291) 1083,-1432 v3(1083,-1537) ; v3(2190,-1231.54) 2191.23,-1232.77 2368.77,-1232.77 v3(2370,-1234) ; v3(2668,-1734) 2668,-1886 JP1.2
  Bottom Layer w40: v2(1841,-330) 1843,-330 1940,-233 v2(1942,-233) ; JP3.2 2095,-75.27 2207.73,-188 JP5.4 2337,-181.78 2348.5,-170.28 2348.5,-163.5 2440,-72 2698.79,-72 v2(2830.59,-203.8)
WP: U3.19 U5.7 | length 520.3
  Top Layer w6: U3.19 2518.42,-1602.92 2518.42,-1656.42 v1(2519,-1657)
  Top Layer w10: v1(2885,-1699) 2923,-1661 U5.7
  Bottom Layer w10: v1(2519,-1657) 2561,-1699 v1(2885,-1699)
pads on no net: JP2.1 JP2.2 JP2.3 U3.1 U3.2 U3.3 U3.4 U3.10 U3.20 U3.25 U3.26 U3.27 U3.28 U3.29 U3.32 U3.33 U3.38 U3.40 U3.41 U3.42 U3.43 Y1.0
copper on no net:
  other v5: 2369.5,-676 2668.9,-675.8

## Polygon pours and split planes (outlines as drawn)
GND on Bottom Layer "GND_L02_P000" (hatched 90Degree grid 15 track 5, pour order 0): 4,-3 -8,-15 -8,-2087 2181,-2087 2187,-2081 2192,-2086 2192,-2341 3747,-2341 3752,-2346 3752,-6 -3,-6 -5,-8

## Keep-outs
Keep-Out Layer:
  the board outline again, w3.94

## Silkscreen, mask and mechanical layers (free items; w line width, h text height)
Top Overlay:
  text "GND" at 1159,-315 h25 r90
  text "5V" at 1251,-315 h25 r90
  text "GND" at 2658,-316.02 h25 r90
  text "3.3V" at 2352,-336.84 h25 r90
  text "SDA_OLED" at 1902.83,-353 h25 r90
  text "SCL_OLED" at 2002.83,-353 h25 r90
  text "3.3V" at 2104,-353 h25 r90
  text "GND" at 2213,-353 h25 r90
  text "SWDIO" at 2450,-361.83 h25 r90
  text "SWCLK" at 2550,-366 h25 r90
  text "DEBUG_TX" at 953.83,-438 h25 r90
  text "DEBUG_RX" at 1015.83,-439 h25 r90
  text "5V" at 2781,-2087.01 h25 r90
  text "MD1" at 2374,-2103.67 h25 r90
  text "MD0" at 2268,-2112 h25 r90
  text "AUX" at 2675,-2112 h25 r90
  text "GND" at 2877,-2112 h25 r90
  text "RxD_LoRa" at 2478.83,-2236.96 h25 r90
  text "TxD_LoRa" at 2582.83,-2236.96 h25 r90
Bottom Overlay:
  text "DATA" at 2034,-1812 h25 r90
  text "GND" at 1935,-1833 h25 r90
  text "5V" at 2135,-1845 h25 r90

## Text inside footprints (layer, text, board x,y; h text height)
U5: Top Overlay "*" at 3167.5,-1728 h25 r180; Mechanical 13 "*" at 3124,-1681.5 h25 r180